# Altium PCB Beagle_3V_SPI_Oled_Rev.PcbDoc
Units mil, origin at the board's own origin, x right, y up, seen from the top; angles counter-clockwise.
Board outline 1105 x 871 mil, 2 copper layers (Top Layer, Bottom Layer); 9 components, 14 nets, 66 pads, 3 vias.
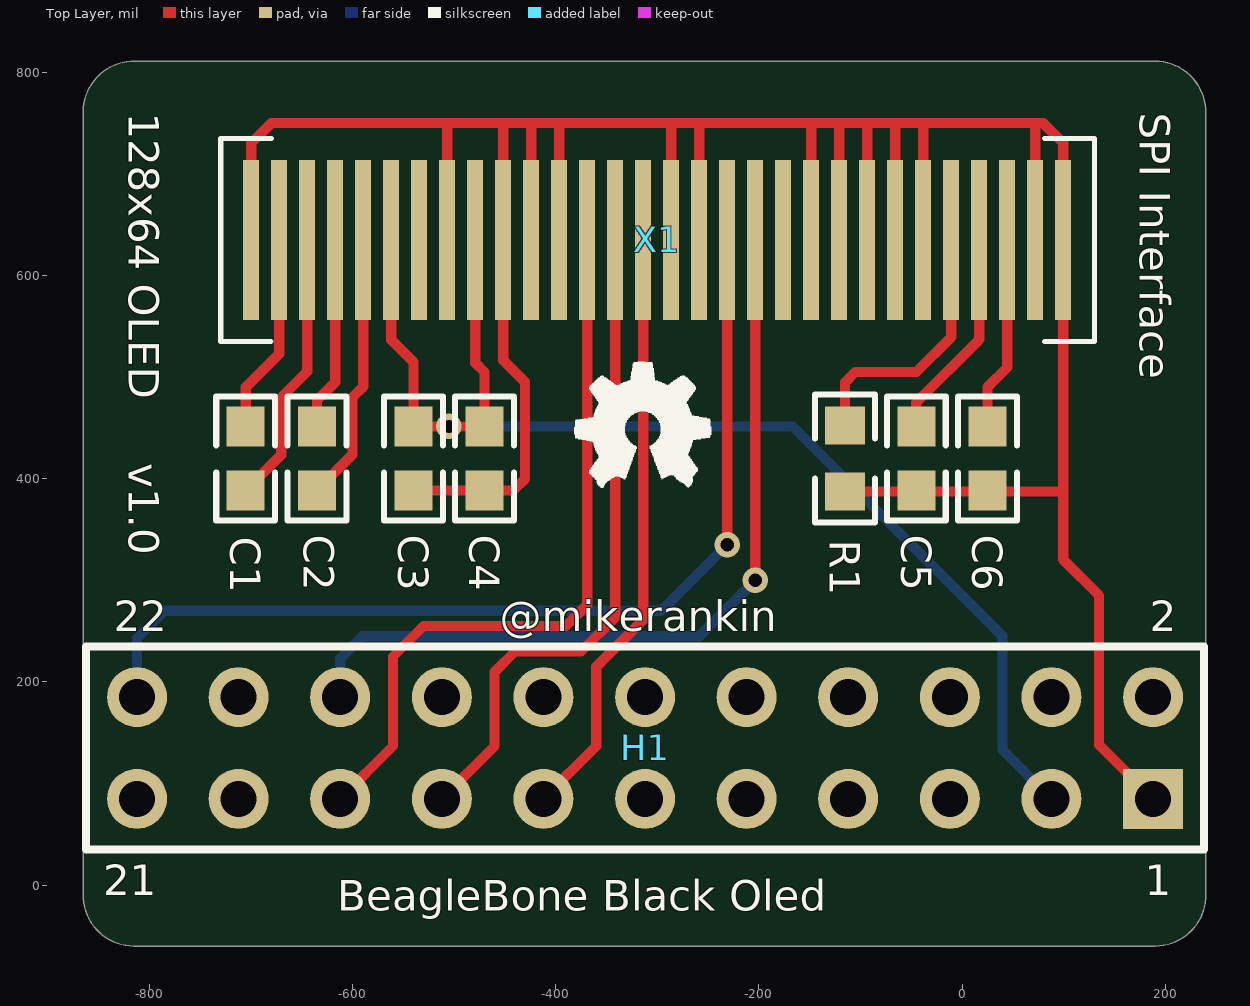
[diagram p0: Top Layer view]
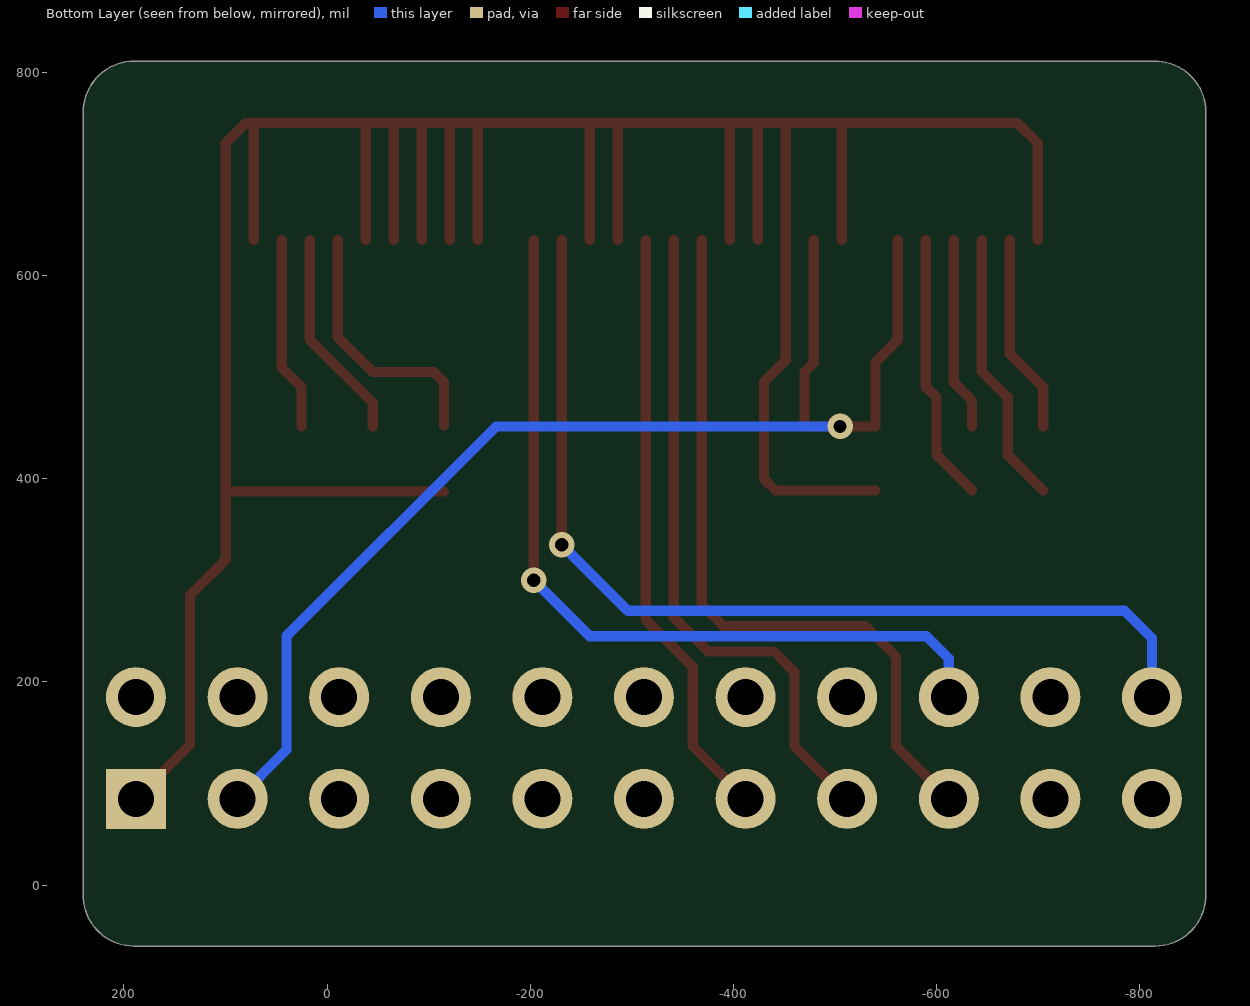
[diagram p1: Bottom Layer view, seen from below]
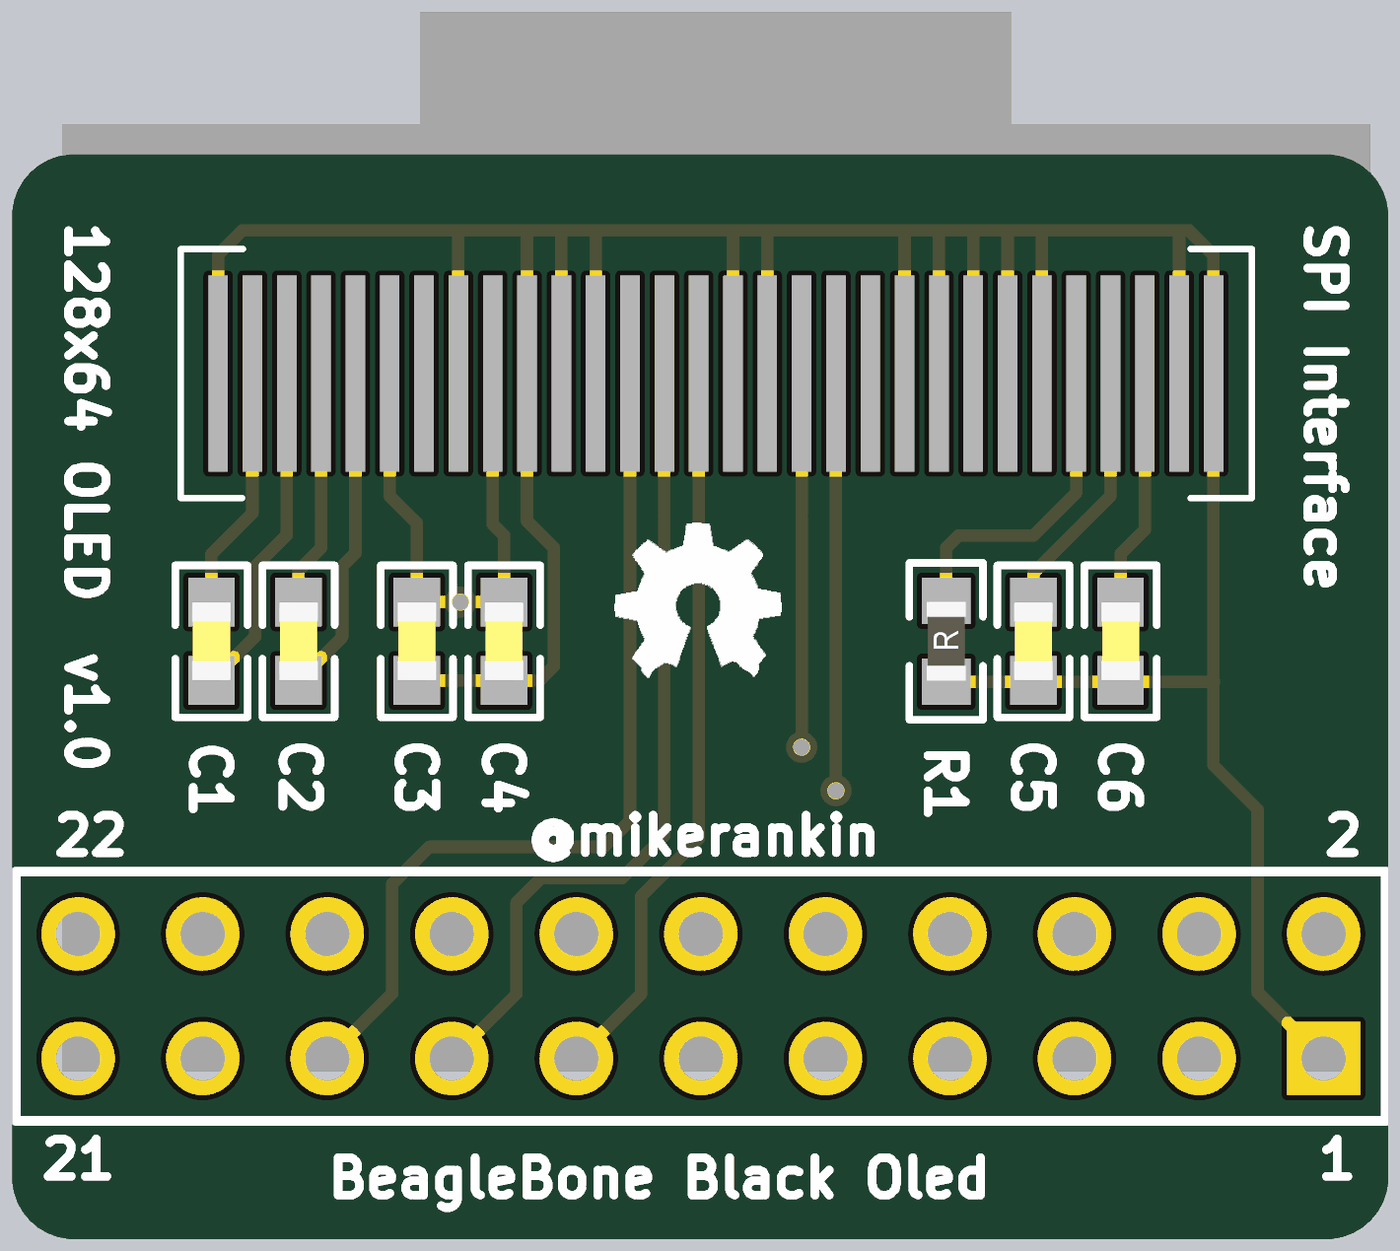
[diagram p2: 3D render of the assembled board from above, using the file's embedded part models]

## Layer stack, top to bottom
Top Solder: solder mask 0.4, Solder Resist, Dk 3.5
Top Layer: signal copper 1.4
Dielectric1: dielectric 12.6, FR-4, Dk 4.8
Bottom Layer: signal copper 1.4
Bottom Solder: solder mask 0.4, Solder Resist, Dk 3.5

## Board outline
-864.99,-9 ccw(c-815,-10) -815,-60 190.01,-60 ccw(c190.01,-10) 240,-9 240,760 239.88,760 ccw(c189.89,761) 189.89,811 -814,811 -814,810.99 ccw(c-815,761) -865,761

## Design rules (kind name [scope] priority, off if disabled: settings)
Clearance TSSOP [HasFootprint('16-SSOP')] p1: gap=7.5
Clearance [All] p2: gap=10
MinimumSolderMaskSliver [All] p1: minsoldermaskwidth=3
PolygonConnect [All] p1: connectstyle=Relief reliefconductorwidth=10 reliefentries=4 polygonreliefangle="90 Angle" airgapwidth=10
RoutingVias [All] p1: holewidth=28 width=50 viastyle="Through Hole" minholewidth=28 minwidth=50 maxholewidth=28 maxwidth=50
SilkToSilkClearance [All] p1: silktosilkclearance=5
SilkToSolderMaskClearance [IsPad] p1: minsilkscreentomaskgap=5 clearancetoexposedcopper=TRUE
SolderMaskExpansion [All] p1: expansion=4
Width [All] p1: maxlimit=10 minlimit=10 preferedwidth=10
26 further rules are at their usual default settings.

## Components (designator, comment, footprint, x,y, rotation, side; value= is the part's Value field where it differs from the comment)
C1 "1uF" CAPC1608X90N -705,420 r90 top
C2 "1uF" CAPC1608X90N -635,420 r90 top
C3 "1uF" CAPC1608X90N -540,420 r90 top
C4 "1uF" CAPC1608X90N -470,420 r90 top
C5 "4.7uF" CAPC1608X90N -45,420 r90 top
C6 "2.2uF" CAPC1608X90N 25,420 r90 top
H1 "Header 11X2" HDR2X11 188,185 r180 top
R1 "390K" RESC1608X55N -115,420 r90 top
X1 "OLED_GLASS" OLED_GLASS -300,635 r0 bottom

## Footprints (in the part's own frame and the unit in brackets; to place one, negate y for a bottom-side part, rotate by r counter-clockwise, add the part's x,y. Pads: shape width x height; smd on the part's side, far side on the other; paste and mask are expansions set on the pad)
CAPC1608X90N [mm] "Chip Capacitor, 2-Leads, Body 1.6x0.8mm, IPC Medium Density (0603)"
  rect 1x0.95 smd: 1(-0.8,0) 2(0.8,0)
  silkscreen extent -1.55,-0.74 1.55,0.74, body extent -0.8,-0.4 0.8,0.4, height 0.79
HDR2X11 [mm] "Connector; Header; 11x2 Position"
  round 1.5 hole 0.9: 1(0,0) 3(2.54,0) 4(2.54,2.54) 5(5.08,0) 6(5.08,2.54) 7(7.62,0) 8(7.62,2.54) 9(10.16,0) 10(10.16,2.54) 11(12.7,0) 12(12.7,2.54) 13(15.24,0) 14(15.24,2.54) 15(17.78,0) 16(17.78,2.54) 17(20.32,0) 18(20.32,2.54) 19(22.86,0) 20(22.86,2.54) 21(25.4,0) 22(25.4,2.54)
  rect 1.5x1.5 hole 0.9: 2(0,2.54)
  silkscreen extent -1.27,-1.27 26.67,3.81
OLED_GLASS [mm] "OLED_GLASS"
  rect 0.4x4 smd far side: 1(-10.15,0) 2(-9.45,0) 3(-8.75,0) 4(-8.05,0) 5(-7.35,0) 6(-6.65,0) 7(-5.95,0) 8(-5.25,0) 9(-4.55,0) 10(-3.85,0) 11(-3.15,0) 12(-2.45,0) 13(-1.75,0) 14(-1.05,0) 15(-0.35,0) 16(0.35,0) 17(1.05,0) 18(1.75,0) 19(2.45,0) 20(3.15,0) 21(3.85,0) 22(4.55,0) 23(5.25,0) 24(5.95,0) 25(6.65,0) 26(7.35,0) 27(8.05,0) 28(8.75,0) 29(9.45,0) 30(10.15,0)
  body extent -13.33,-7.37 13.34,14.22, height 3.33
RESC1608X55N [mm] "Chip Resistor, 2-Leads, Body 1.6x0.8mm, IPC Medium Density (0603 med)"
  rect 0.95x1 smd: 1(-0.825,0) 2(0.825,0)
  silkscreen extent -1.6,-0.75 1.6,0.75, body extent -0.8,-0.4 0.8,0.4, height 0.54

## Part data
C1 C2 C3 C4 C5 C6: library part CAP_0603, "CAP 0603"
H1: "Header, 11-Pin, Dual row"
R1: library part RES_0603, "RES 0603"

## Via types
v1: diameter 25, hole 13, Top Layer to Bottom Layer, tented both sides, 3 vias

## Nets (pads, with @x,y where several pads share a name; then routed paths per layer and width w, separated by ;. In a path a pad name is that pad's centre, name@x,y a point inside that pad or via, vN(x,y) a via of type N, cw(c..) or ccw(c..) an arc to the next point about the centre after c; other vN are vias at no path point)
+3.3V: C3.2 C4.2 H1.4 X1.6 X1.9 | length 1260.2
  Top Layer w10: X1.6 -561.81,536.81 -540,515 C3.2 v1(-505,451.5) C4.2 -470,505 -479.13,514.13 X1.9
  Bottom Layer w10: v1(-505,451.5) -166.5,451.5 40,245 40,133 H1.4
GND: C3.1 C4.1 C5.1 C6.1 H1.2 R1.1 X1.1 X1.8 X1.10 X1.11 X1.12 X1.16 X1.17 X1.21 X1.22 X1.23 X1.24 X1.25 X1.29 X1.30 | length 3546.6
  Top Layer w10: X1.1 -699.61,730.39 -680,750 -506.69,750 ; C3.1 C4.1 -441.5,388.5 -430,400 -430,495 -451.57,516.57 X1.10 -451.57,750 ; X1.8 -506.69,750 ; X1.11 -424.02,750 ; X1.12 -396.46,750 ; X1.16 -286.22,750 ; X1.17 -258.66,750 ; X1.21 -148.43,750 ; X1.22 -120.87,750 ; R1.1 100,387.52 ; X1.23 -93.31,750 ; X1.24 -65.75,750 ; X1.25 -38.19,750 ; X1.29 72.05,750 ; H1.2 135,138 135,285 99.61,320.39 X1.30 99.61,730.39 80,750 72.05,750 ; -506.69,750 -451.57,750 ; -451.57,750 -424.02,750 ; -424.02,750 -396.46,750 ; -396.46,750 -286.22,750 ; -286.22,750 -258.66,750 ; -258.66,750 -148.43,750 ; -148.43,750 -120.87,750 ; -120.87,750 -93.31,750 ; -93.31,750 -65.75,750 ; -65.75,750 -38.19,750 ; -38.19,750 72.05,750
NetC1_1: C1.1 X1.3 | length 271.6
  Top Layer w10: C1.1 -670,423.5 -670,480 -644.49,505.51 X1.3
NetC1_2: C1.2 X1.2 | length 197.2
  Top Layer w10: C1.2 -705,490 -672.05,522.95 X1.2
NetC2_1: C2.1 X1.5 | length 265.4
  Top Layer w10: C2.1 -600,423.5 -600,480 -589.37,490.63 X1.5
NetC2_2: C2.2 X1.4 | length 191
  Top Layer w10: C2.2 -635,476.93 -616.93,495 X1.4
NetC5_2: C5.2 X1.27 | length 209.2
  Top Layer w10: C5.2 -45,475 16.93,536.93 X1.27
NetC6_2: C6.2 X1.28 | length 191.6
  Top Layer w10: C6.2 25,490 44.49,509.49 X1.28
NetH1_14: H1.14 X1.15 | length 590.7
  Top Layer w10: H1.14 -360,137 -360,215 -313.78,261.22 X1.15
NetH1_16: H1.16 X1.14 | length 658.8
  Top Layer w10: H1.16 -460,137 -460,210 -440,230 -375,230 -341.34,263.66 X1.14
NetH1_17: H1.17 X1.19 | length 813.4
  Top Layer w10: v1(-203.54,300) X1.19
  Bottom Layer w10: H1.17 -612,223 -590,245 -258.54,245 v1(-203.54,300)
NetH1_18: H1.18 X1.13 | length 732.7
  Top Layer w10: H1.18 -560,137 -560,225 -530,255 -390,255 -368.9,276.1 X1.13
NetH1_21: H1.21 X1.18 | length 977
  Top Layer w10: v1(-231.1,335) X1.18
  Bottom Layer w10: H1.21 -812,243 -785,270 -296.1,270 v1(-231.1,335)
NetR1_2: R1.2 X1.26 | length 260.9
  Top Layer w10: R1.2 -115,495 -105,505 -45,505 -10.63,539.37 X1.26
pads on no net: H1.1 H1.3 H1.5 H1.6 H1.7 H1.8 H1.9 H1.10 H1.11 H1.12 H1.13 H1.15 H1.19 H1.20 H1.22 X1.7 X1.20

## Silkscreen, mask and mechanical layers (free items; w line width, h text height)
Top Overlay:
  region: 697 vertices and 0 holes, not listed, extent -381.48,390.89 -246.89,515.29
  text "128x64 OLED" at -820,760 h30 r270
  text "SPI Interface" at 175,760 h30 r270
  text "v1.0" at -820,415 h30 r270
  text "@mikerankin" at -455,250 h30
  text "BeagleBone Black Oled" at -615,-25 h30
Mechanical 1:
  lines w10: 239.88,760 ccw(c189.89,761) 189.89,811 -814,811 ccw(c-815,761) -865,761 -865,-9 ccw(c-815,-10) -815,-60 190.01,-60 ccw(c190.01,-10) 240,-9 240,760

## Text inside footprints (layer, text, board x,y; h text height)
H1: Top Overlay "21" at -845,-10 h30; Top Overlay "22" at -835,250 h30; Top Overlay "1" at 180,-10 h30; Top Overlay "2" at 185,250 h30